# Altium PCB Ticket_Dispancer.PcbDoc (part 1 of 5)
Units mm, origin at the board's own origin, x right, y up, seen from the top; angles counter-clockwise.
Board outline 150.11 x 200.66 mm, 2 copper layers (Top Layer, Bottom Layer); 297 components, 258 nets, 997 pads, 217 vias.
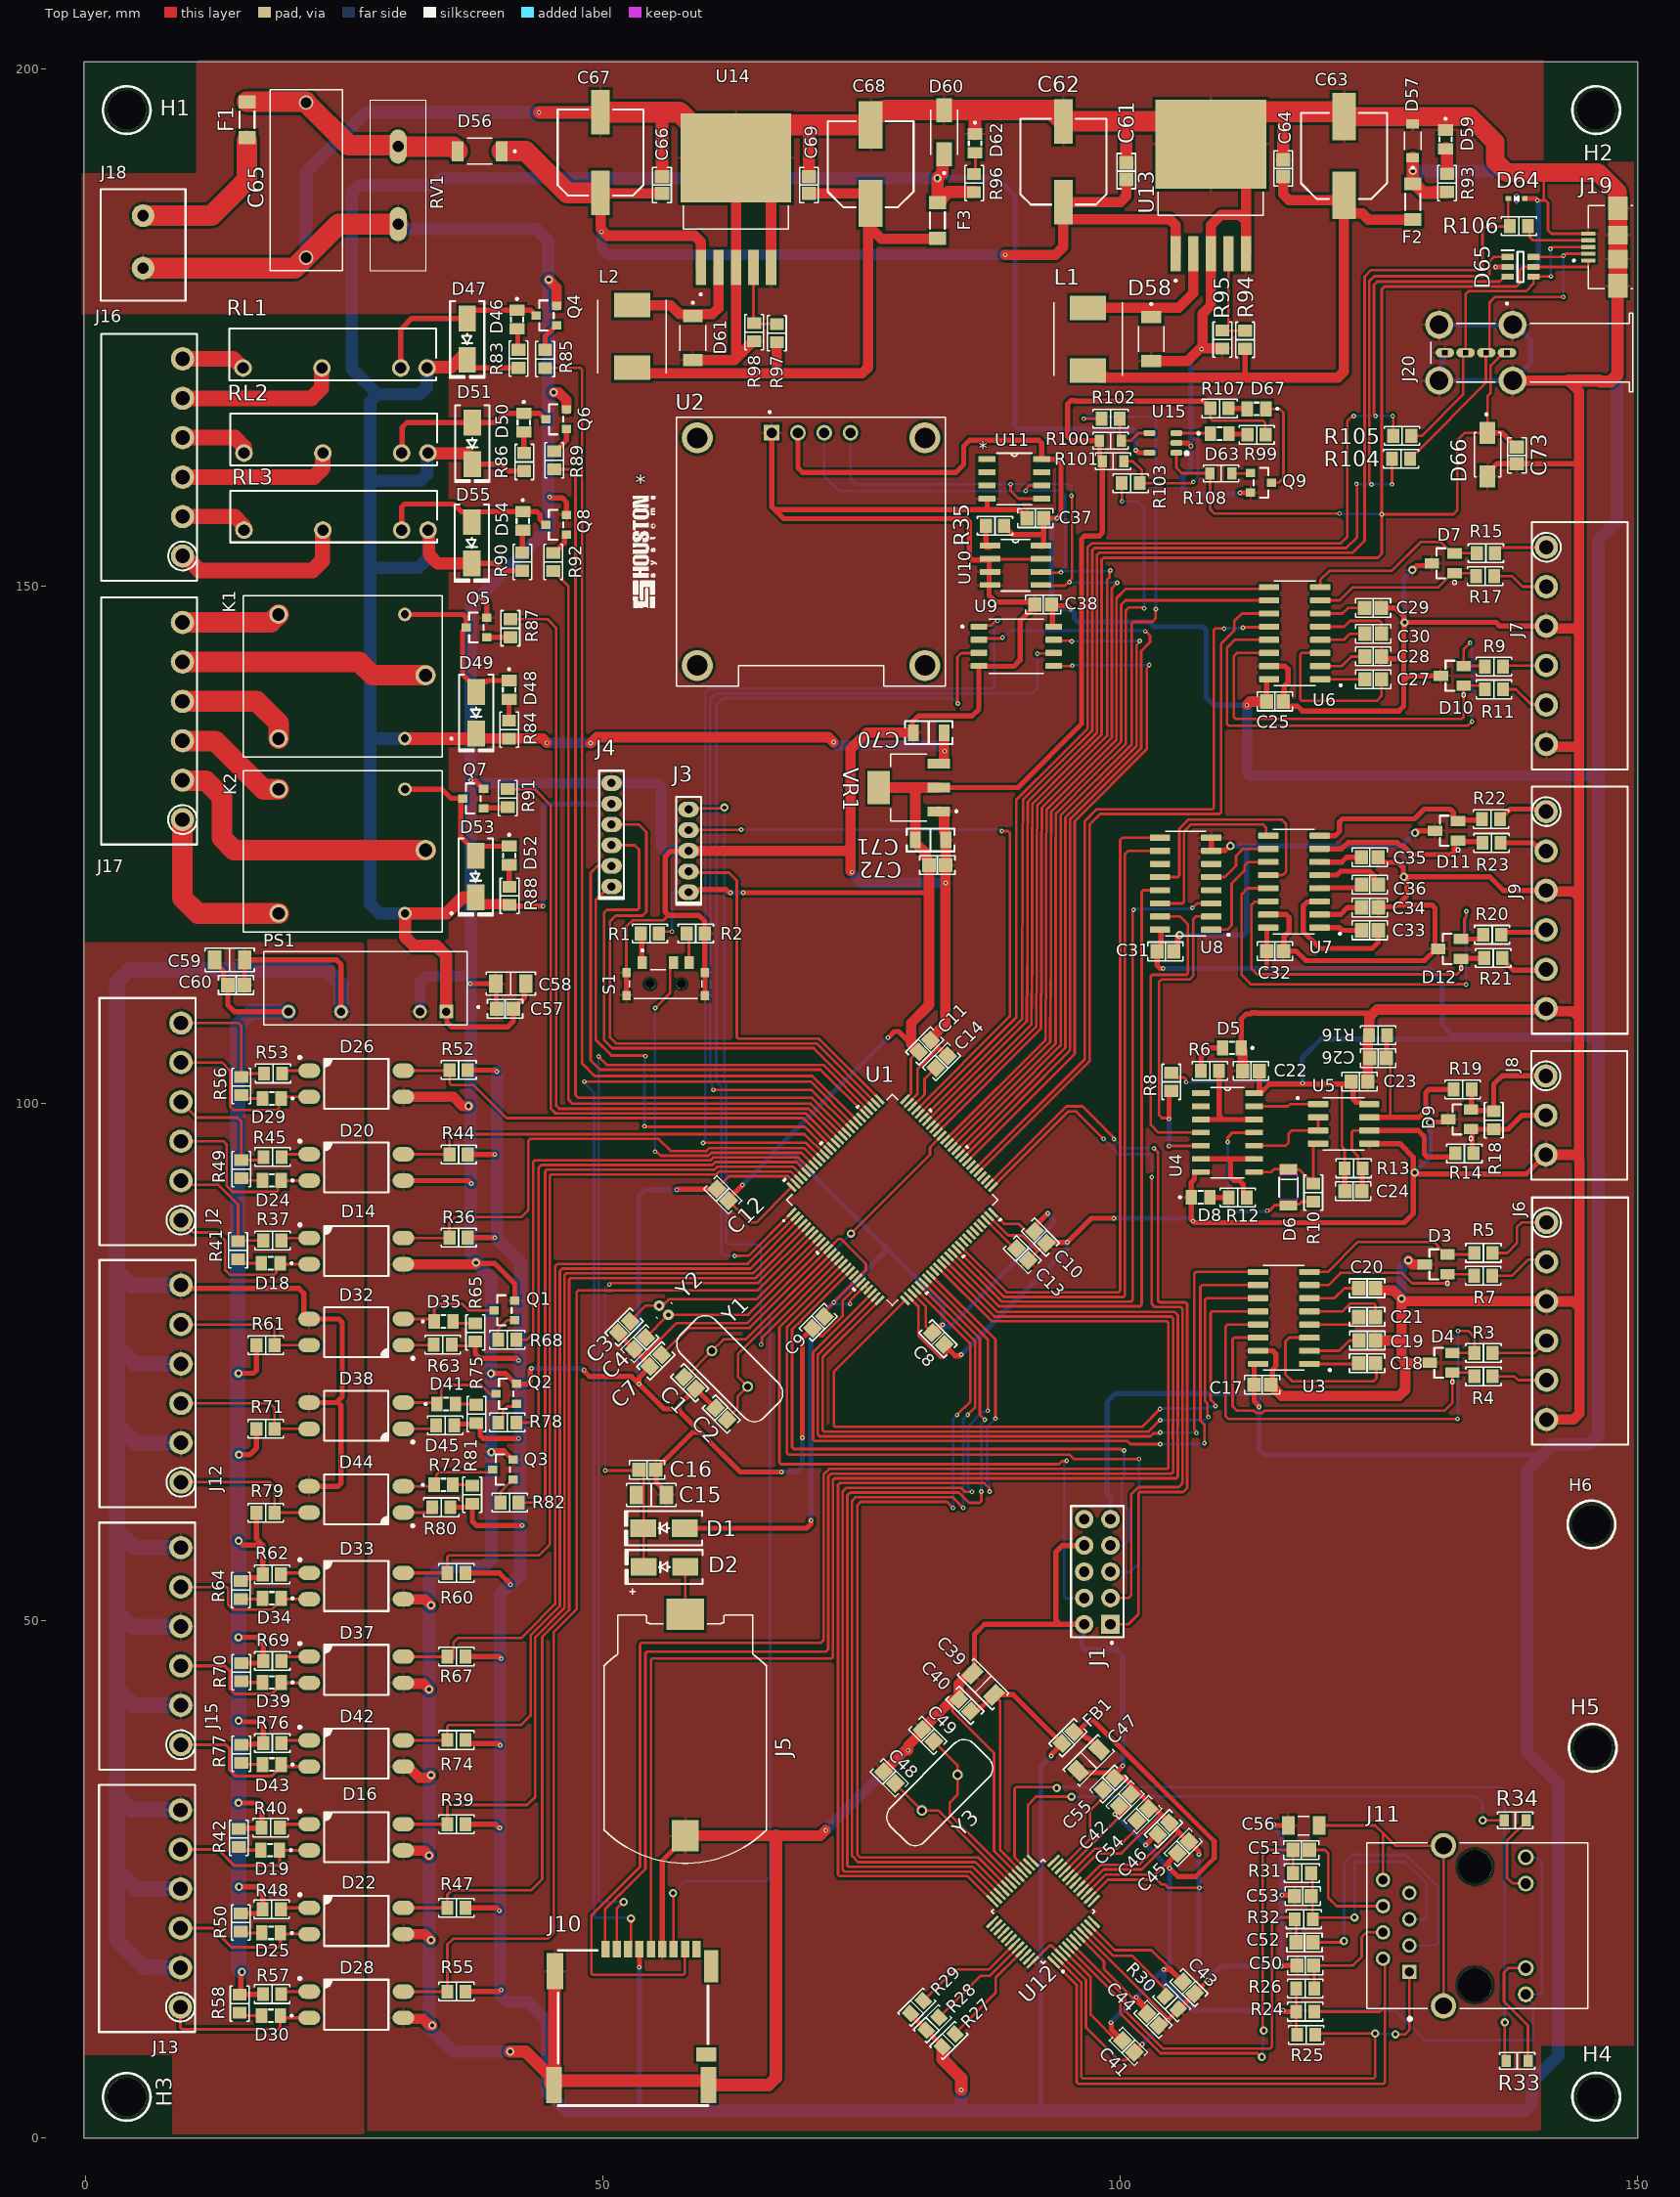
[diagram p0: Top Layer view]
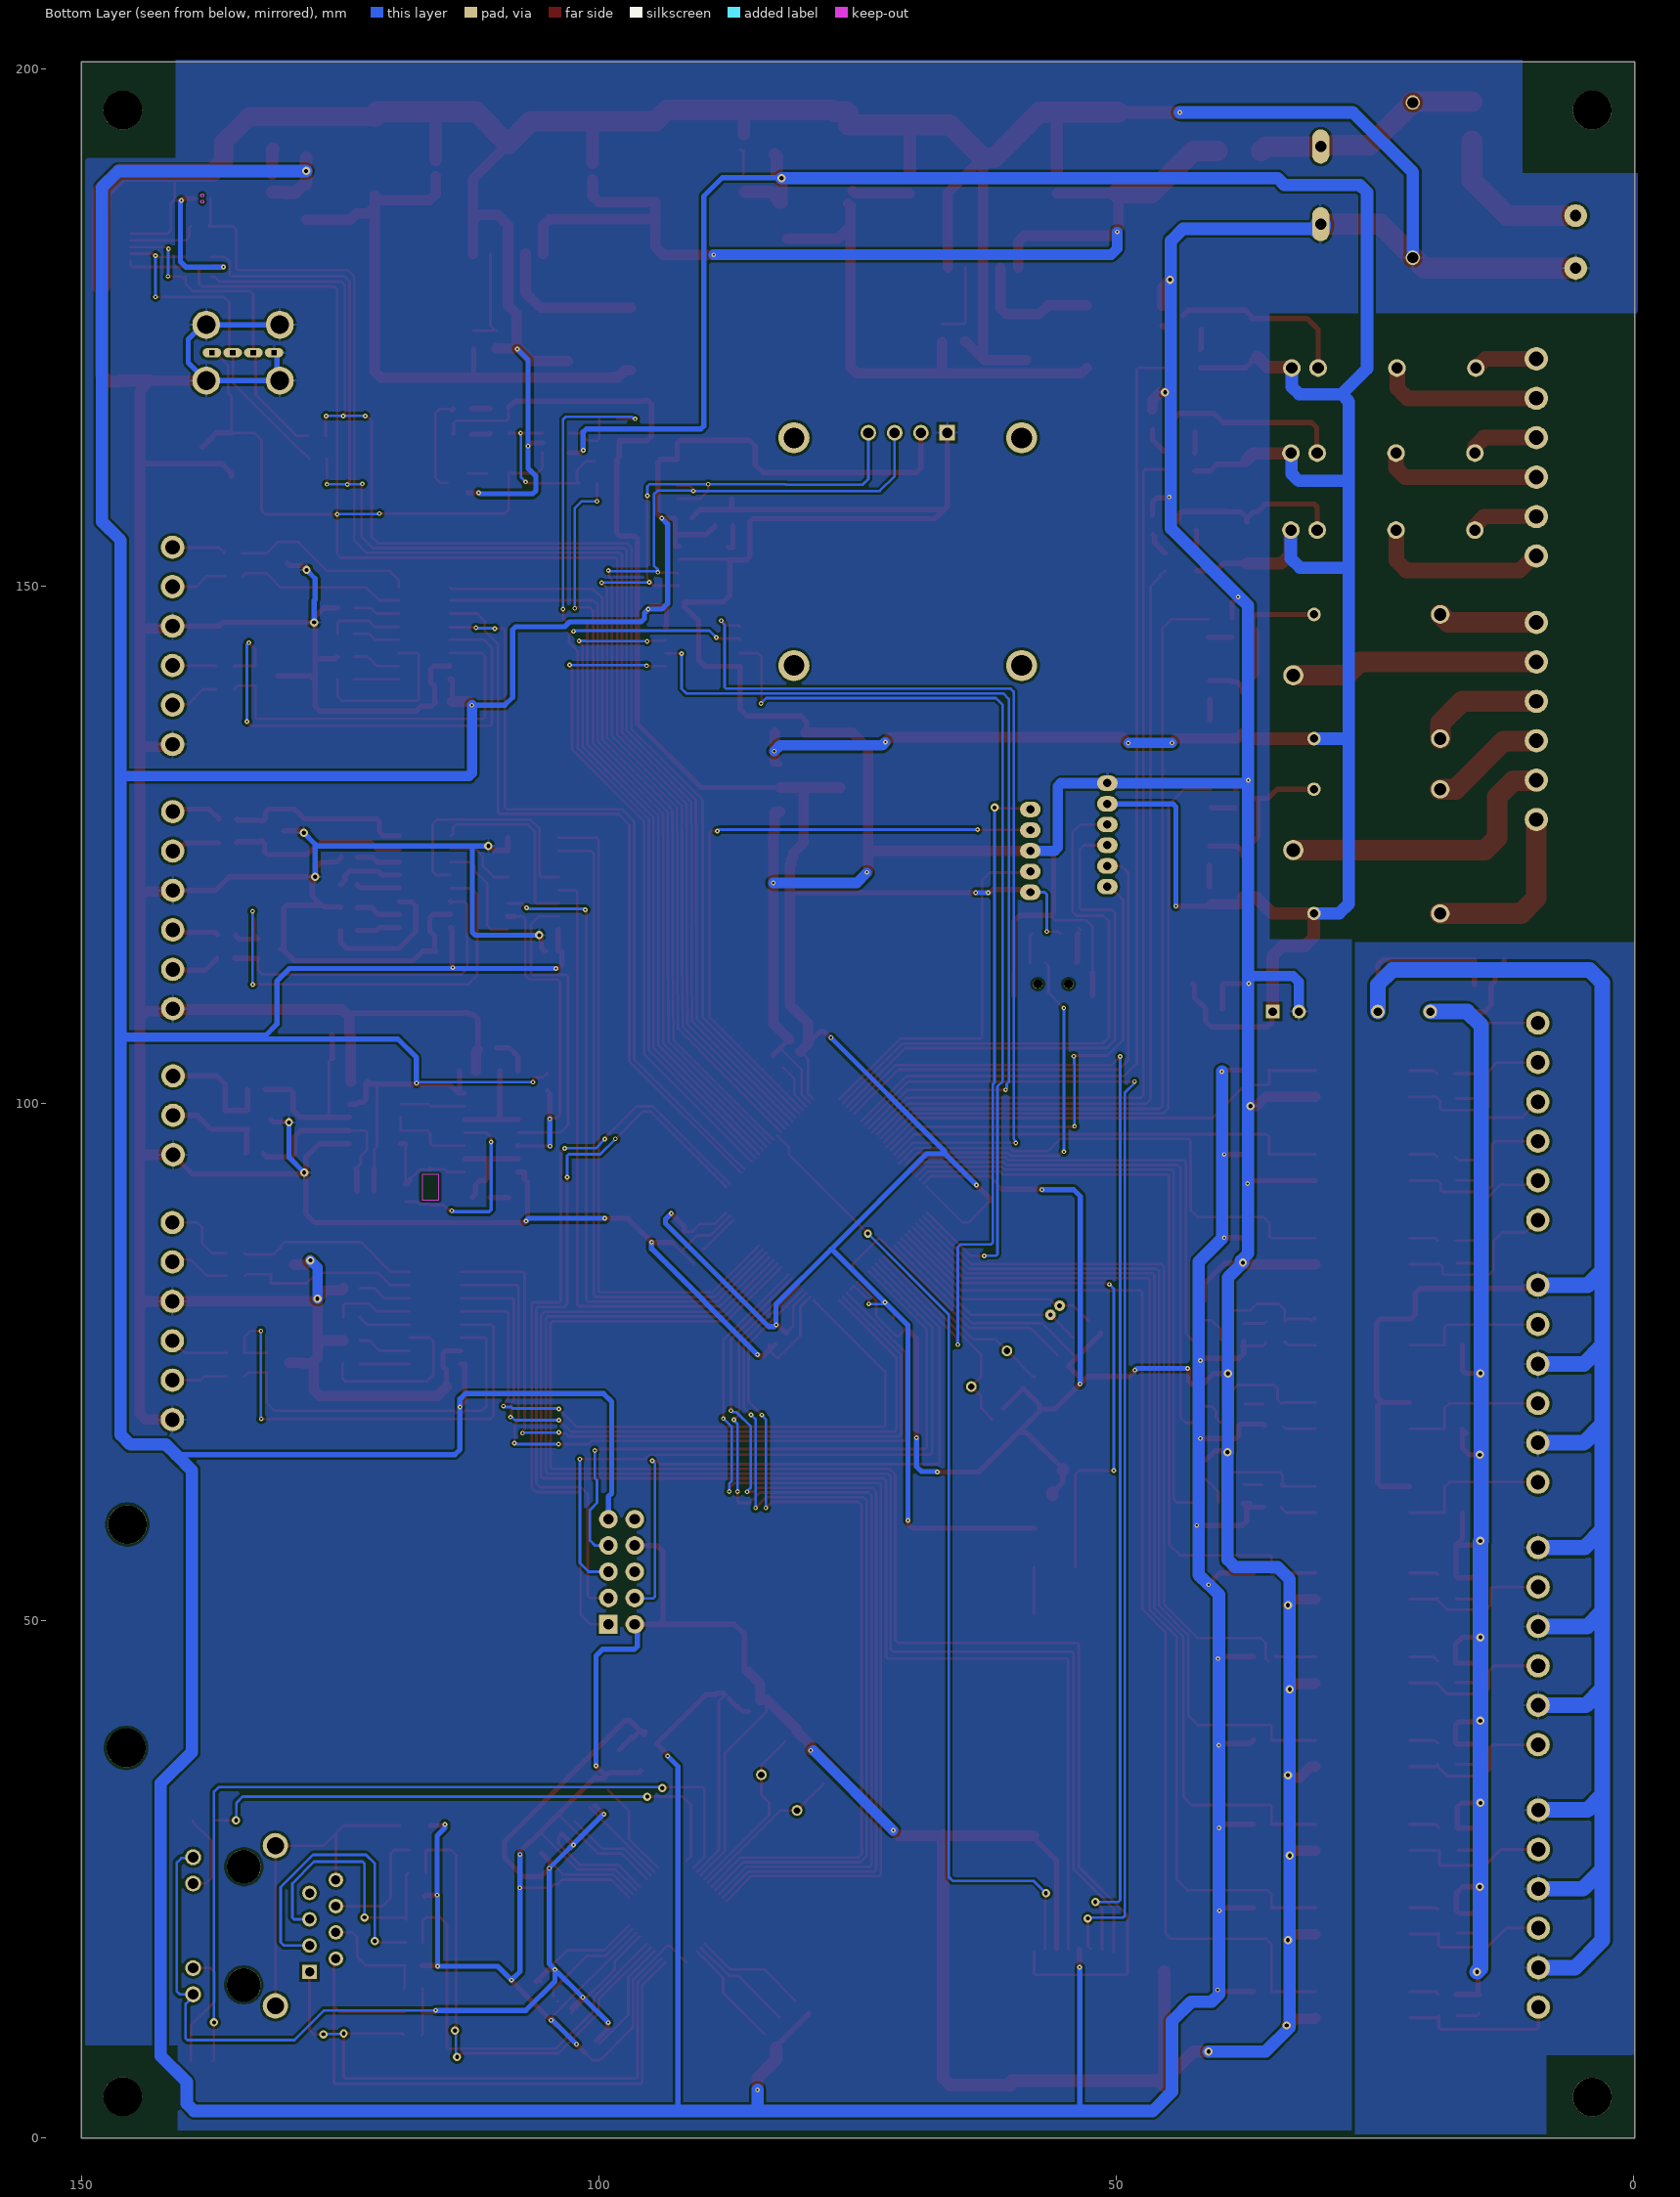
[diagram p1: Bottom Layer view, seen from below]
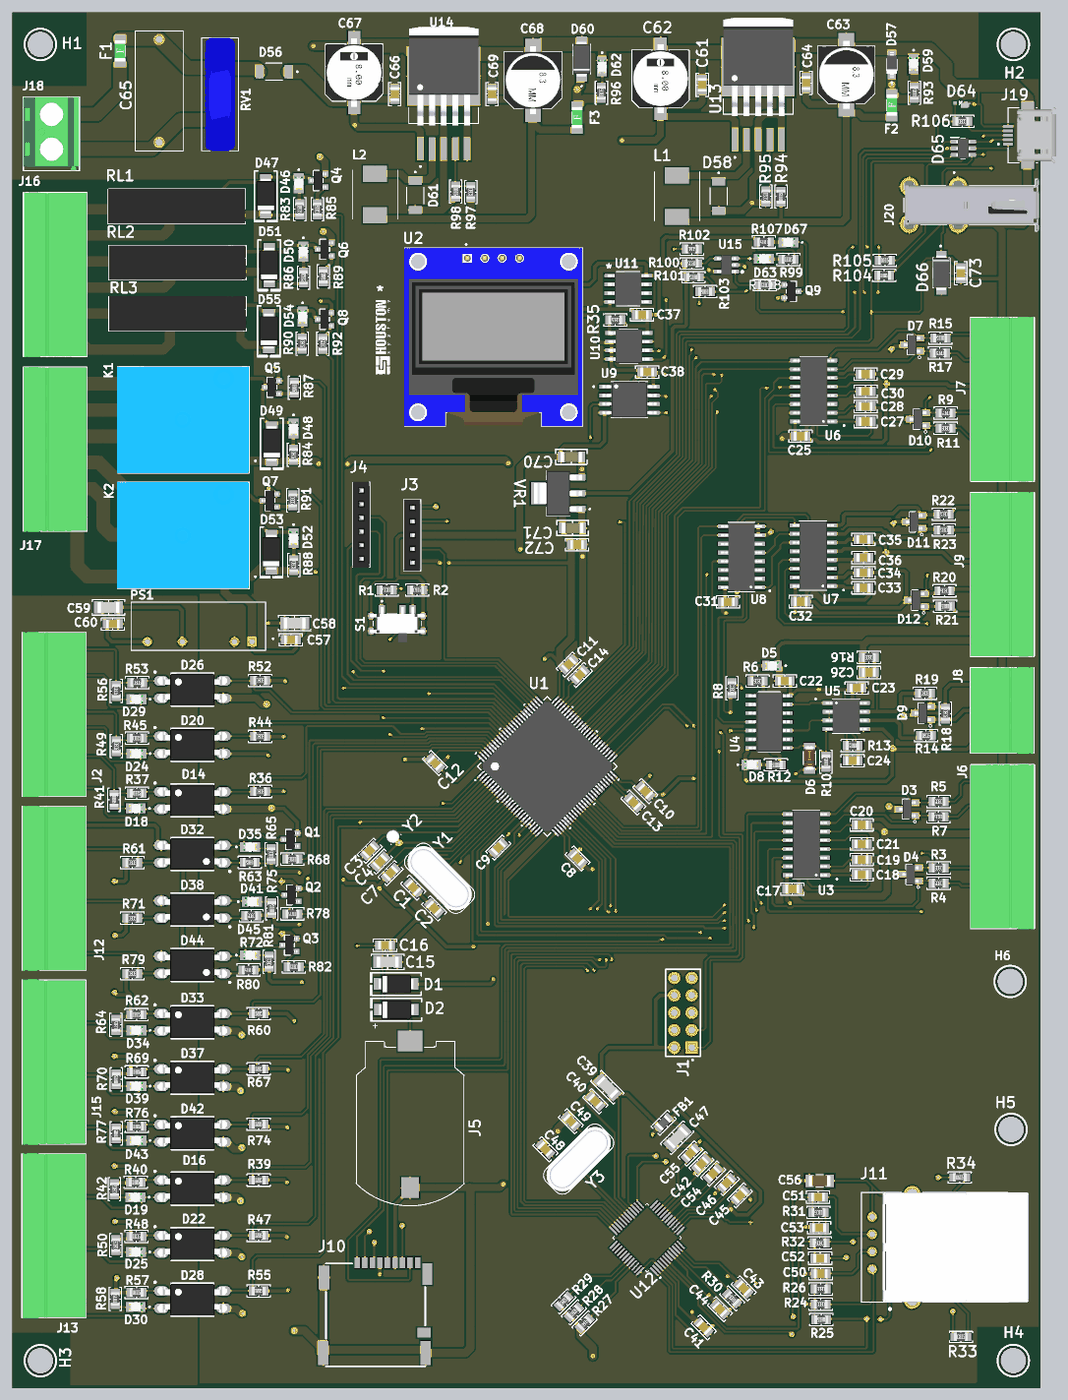
[diagram p4: 3D render of the assembled board from above, using the file's embedded part models]

## Layer stack, top to bottom
Top Solder: solder mask 0.0102, Solder Resist, Dk 3.5
Top Layer: signal copper 0.0356
Dielectric 1: dielectric 0.32, FR-4, Dk 4.8
Bottom Layer: signal copper 0.0356
Bottom Solder: solder mask 0.0102, Solder Resist, Dk 3.5

## Board outline
-0.127,0 149.987,0 149.987,200.66 -0.127,200.66

## Design rules (kind name [scope] priority, off if disabled: settings)
Clearance [All] p1: gap=0.254 ignorepadtopadclearanceinfootprint=TRUE except(0.2: Arc-Arc Arc-Track Arc-SMDPad Arc-THPad Track-Track Track-SMDPad Track-THPad SMDPad-SMDPad SMDPad-THPad THPad-THPad)
HoleSize [All] p1: absolutevalues=TRUE maxlimit=5 minlimit=0.15 maxpercent=80.000 minpercent=20.000
MatchedLengths [InNet('CMD') OR  InNet('D0') OR  InNet('D1') OR  InNet('D2') OR  InNet('D3')] p1: tolerance=0.25 checknetsindiffpair=FALSE checkdiffpairvsdiffpair=TRUE checkxsignals=TRUE checkothers=TRUE
MinimumSolderMaskSliver [All] p1: minsoldermaskwidth=0.001
PolygonConnect [All] p1: connectstyle=Relief reliefconductorwidth=0.254 reliefentries=4 polygonreliefangle="90 Angle" airgapwidth=0.254
RoutingVias Routingsignal [All] p1: holewidth=0.3 width=0.6 viastyle="Through Hole" minholewidth=0.2 minwidth=0.45 maxholewidth=0.4 maxwidth=0.8
RoutingVias RoutingVias_1 [All] p2: holewidth=0.711 width=1.27 viastyle="Through Hole" minholewidth=0.711 minwidth=1.27 maxholewidth=0.711 maxwidth=1.27
RoutingVias Routingpower [All] p3: holewidth=0.45 width=1 viastyle="Through Hole" minholewidth=0.35 minwidth=0.8 maxholewidth=0.6 maxwidth=1.4
SilkToSilkClearance [All] p1: silktosilkclearance=0.01
SilkToSolderMaskClearance [IsPad] p1: minsilkscreentomaskgap=0.01 clearancetoexposedcopper=TRUE
SolderMaskExpansion [All] p1: expansion=0.102 istentingtop=FALSE
Width [All] p1 off: maxlimit=0.5 minlimit=0.254 preferedwidth=0.254
Width Width_Current [InNetClass('High_current')] p2: maxlimit=3 minlimit=0.25 preferedwidth=2
Width Width_Signal [InNetClass('signal')] p3: maxlimit=0.5 minlimit=0.2 preferedwidth=0.25
Width Width_Power [InNetClass('power')] p4: maxlimit=1.8 minlimit=0.25 preferedwidth=1.2
26 further rules are at their usual default settings.

## Classes and differential pairs
net class High_current: GND NetC61_2 NetC63_1 NetC65_2 NetC68_1 NetD58_C NetD61_C NetF1_1 NetJ16_1 NetJ16_2 NetJ16_3 NetJ16_4 NetJ16_5 NetJ16_6 NetJ17_1 NetJ17_2 NetJ17_3 NetJ17_4 NetJ17_5 NetJ17_6
net class power: 3v3 5v GND MVCC
component class Usb: C73 D63 D64 D65 D66 D67 J19 J20 Q9 R99 R100 R101 R102 R103 R104 R105 R106 R107 R108 U15
component class Relay: D46 D47 D48 D49 D50 D51 D52 D53 D54 D55 J16 J17 K1 K2 Q4 Q5 Q6 Q7 Q8 R83 R84 R85 R86 R87 R88 R89 R90 R91 R92 RL1 RL2 RL3
component class Power: C61 C62 C63 C64 C65 C66 C67 C68 C69 C70 C71 C72 D56 D57 D58 D59 D60 D61 D62 F1 F2 F3 J18 L1 L2 R93 R94 R95 R96 R97 R98 RV1 U13 U14 VR1
component class DI_DO: C57 C58 C59 C60 D14 D16 D18 D19 D20 D22 D24 D25 D26 D28 D29 D30 D32 D33 D34 D35 D37 D38 D39 D41 D42 D43 D44 D45 J2 J12 J13 J15 PS1 Q1 Q2 Q3 R36 R37 R39 R40 R41 R42 R44 R45 R47 R48 R49 R50 R52 R53 R55 R56 R57 R58 R60 R61 R62 R63 R64 R65 R67 R68 R69 R70 R71 R72 R74 R75 R76 R77 R78 R79 R80 R81 R82
component class memory: C37 C38 J10 R35 U9 U10 U11
component class LAN: C39 C40 C41 C42 C43 C44 C45 C46 C47 C48 C49 C50 C51 C52 C53 C54 C55 C56 FB1 J11 R24 R25 R26 R27 R28 R29 R30 R31 R32 R33 R34 U12 Y3
component class main: * C1 C2 C3 C4 C7 C8 C9 C10 C11 C12 C13 C14 C15 C16 D1 D2 H1 H2 H3 H4 H5 H6 J1 J3 J4 J5 R1 R2 S1 U1 U2 Y1 Y2
component class commucation: C17 C18 C19 C20 C21 C22 C23 C24 C25 C26 C27 C28 C29 C30 C31 C32 C33 C34 C35 C36 D3 D4 D5 D6 D7 D8 D9 D10 D11 D12 J6 J7 J8 J9 R3 R4 R5 R6 R7 R8 R9 R10 R11 R12 R13 R14 R15 R16 R17 R18 R19 R20 R21 R22 R23 U3 U4 U5 U6 U7 U8

## Components (designator, comment, footprint, x,y, rotation, side; value= is the part's Value field where it differs from the comment)
* "HOUSTON_LOGO" HOUSTON_LOGO 57.74,151.22 r90 top
C1 "15pF" "CAP 0805_2012" 58.404,72.996 r315 top
C2 "15pF" "CAP 0805_2012" 61.454,69.976 r135 top
C3 "15pF" "CAP 0805_2012" 52.07,78.385 r225 top
C4 "15pF" "CAP 0805_2012" 53.593,76.79 r225 top
C7 "1µF" "CAP 0805_2012" 55.13,75.13 r45 top
C8 "1µF" "CAP 0805_2012" 82.406,77.254 r135 top
C9 "1µF" "CAP 0805_2012" 70.83,78.84 r45 top
C10 "1µF" "CAP 0805_2012" 92.284,87.076 r135 top
C11 "1µF" "CAP 0805_2012" 81.11,105.55 r225 top
C12 "1µF" "CAP 0805_2012" 61.594,91.166 r315 top
C13 "4.7 µF" "CAP 0805_2012" 90.54,85.39 r315 top
C14 "4.7 µF" "CAP 0805_2012" 82.744,104.026 r45 top
C15 "10 µF" "CAP 1206_3216 - 0.8MM" 54.69,62.15 r180 top
C16 "1µF" "CAP 0805_2012" 54.3,64.58 r180 top
C17 "1µF" "CAP 0805_2012" 113.74,72.8 r180 top
C18 "1µF" "CAP 0805_2012" 123.86,74.882 r180 top
C19 "1µF" "CAP 0805_2012" 123.867,77.086 r180 top
C20 "1µF" "CAP 0805_2012" 123.86,82.14 r180 top
C21 "1µF" "CAP 0805_2012" 123.86,79.36 r180 top
C22 "1µF" "CAP 0805_2012" 112.64,103.13 r0 top
C23 "1µF" "CAP 0805_2012" 123.13,102.11 r180 top
C24 "1000 pF" "CAP 0805_2012" 122.53,91.516 r180 top
C25 "1µF" "CAP 0805_2012" 114.95,138.84 r180 top
C26 "1000 pF" "CAP 0805_2012" 124.91,104.381 r180 top
C27 "1µF" "CAP 0805_2012" 124.443,140.987 r180 top
C28 "1µF" "CAP 0805_2012" 124.443,143.192 r180 top
C29 "1µF" "CAP 0805_2012" 124.43,147.88 r180 top
C30 "1µF" "CAP 0805_2012" 124.443,145.396 r180 top
C31 "1µF" "CAP 0805_2012" 104.36,114.69 r0 top
C32 "1µF" "CAP 0805_2012" 114.97,114.72 r180 top
C33 "1µF" "CAP 0805_2012" 124.134,116.729 r180 top
C34 "1µF" "CAP 0805_2012" 124.134,118.933 r180 top
C35 "1µF" "CAP 0805_2012" 124.11,123.79 r180 top
C36 "1µF" "CAP 0805_2012" 124.134,121.138 r180 top
C37 "1µF" "CAP 0805_2012" 91.8,156.559 r0 top
C38 "1µF" "CAP 0805_2012" 92.56,148.213 r0 top
C39 "10 µF" "CAP 1206_3216 - 0.8MM" 86.76,43.87 r315 top
C40 "1µF" "CAP 0805_2012" 84.99,41.82 r315 top
C41 "1µF" "CAP 0805_2012" 100.8,8.86 r135 top
C42 "1µF" "CAP 0805_2012" 100.475,32.68 r225 top
C43 "1µF" "CAP 0805_2012" 106.63,14.54 r135 top
C44 "1µF" "CAP 0805_2012" 103.17,11.47 r135 top
C45 "1µF" "CAP 0805_2012" 106.086,28.096 r225 top
C46 "1µF" "CAP 0805_2012" 104.183,29.908 r225 top
C47 "10 µF" "CAP 1206_3216 - 0.8MM" 96.96,36.51 r45 top
C48 "15pF" "CAP 0805_2012" 77.696,34.834 r315 top
C49 "15pF" "CAP 0805_2012" 81.41,38.91 r315 top
C50 "0.022 µF" "CAP 0805_2012" 117.889,16.683 r180 top
C51 "6800 pF" "CAP 0805_2012" 117.49,27.844 r0 top
C52 "6800 pF" "CAP 0805_2012" 117.809,18.915 r0 top
C53 "10000 pF" "CAP 0805_2012" 117.65,23.379 r0 top
C54 "4.7 µF" "CAP 0805_2012" 102.173,31.26 r45 top
C55 "10000 pF" "CAP 0805_2012" 98.898,34.22 r45 top
C56 "1206Y2K00102KXT" CAPC3216X160N 117.73,30.21 r0 top
C57 "1µF" "CAP 0805_2012" 40.56,109.15 r0 top
C58 "10 µF" "CAP 1206_3216 - 0.8MM" 41.115,111.579 r0 top
C59 "10 µF" "CAP 1206_3216 - 0.8MM" 13.943,113.869 r180 top
C60 "1µF" "CAP 0805_2012" 14.57,111.44 r180 top
C61 "1µF" "CAP 0805_2012" 100.59,190.1 r270 top
C62 "220 µF" "CAP ALSMD ELEC 8.3MM H11MM" 94.51,191.01 r90 top
C63 "470 µF" "CAP ALSMD 8.3MM H10.5MM" 121.63,191.57 r90 top
C64 "1µF" "CAP 0805_2012" 115.75,190.38 r270 top
C65 "ECWFE2W105JA" CAPRR1500W80L1750T700H1250 21.336,189.23 r90 top
C66 "1µF" "CAP 0805_2012" 55.72,188.76 r270 top
C67 "220 µF" "CAP ALSMD ELEC 8.3MM H11MM" 49.784,191.897 r90 top
C68 "470 µF" "CAP ALSMD 8.3MM H10.5MM" 75.89,190.77 r90 top
C69 "1µF" "CAP 0805_2012" 69.93,188.76 r270 top
C70 "10 µF" "MURATA CAP GRM31C 1206_3216" 81.5,135.83 r0 top
C71 "10 µF" "MURATA CAP GRM31C 1206_3216" 81.678,125.461 r180 top
C72 "1µF" "CAP 0805_2012" 82.324,123.032 r180 top
C73 "4.7 µF" "CAP 0805_2012" 138.33,162.63 r90 top
D1 "CGRA4007-G" "DO214AC SMA" 55.91,58.945 r180 top
D2 "CGRA4007-G" "DO214AC SMA" 55.96,55.189 r180 top
D3 "SM712.TCT" SM712.TCT 130.53,84.45 r180 top
D4 "SM712.TCT" SM712.TCT 131.01,74.93 r180 top
D5 "597-3305-607F" LEDC2012X70N 110.78,105.36 r180 top
D6 "LL4148-GS08" MELF_SOD-80 116.27,91.89 r90 top
D7 "SM712.TCT" SM712.TCT 131.21,152.2 r180 top
D8 "597-3305-607F" LEDC2012X70N 107.779,90.93 r0 top
D9 "SM712.TCT" SM712.TCT 132.79,98.45 r180 top
D10 "SM712.TCT" SM712.TCT 132.09,141.33 r180 top
D11 "SM712.TCT" SM712.TCT 131.54,126.35 r180 top
D12 "SM712.TCT" SM712.TCT 131.84,114.93 r180 top
D14 "LTV-817S-TA1" "LITEON LTV-817" 26.189,85.72 r0 top locked
D16 "LTV-817S-TA1" "LITEON LTV-817" 26.189,29.07 r0 top locked
D18 "597-3305-607F" LEDC2012X70N 17.92,84.55 r180 top
D19 "597-3305-607F" LEDC2012X70N 17.87,27.83 r180 top
D20 "LTV-817S-TA1" "LITEON LTV-817" 26.189,93.81 r0 top locked
D22 "LTV-817S-TA1" "LITEON LTV-817" 26.189,20.98 r0 top locked
D24 "597-3305-607F" LEDC2012X70N 18.024,92.55 r180 top
D25 "597-3305-607F" LEDC2012X70N 17.95,19.83 r180 top
D26 "LTV-817S-TA1" "LITEON LTV-817" 26.189,101.9 r0 top locked
D28 "LTV-817S-TA1" "LITEON LTV-817" 26.189,12.89 r0 top locked
D29 "597-3305-607F" LEDC2012X70N 18.024,100.474 r180 top
D30 "597-3305-607F" LEDC2012X70N 17.934,11.83 r180 top
D32 "LTV-817S-TA1" "LITEON LTV-817" 26.18,77.9 r180 top locked
D33 "LTV-817S-TA1" "LITEON LTV-817" 26.189,53.35 r0 top locked
D34 "597-3305-607F" LEDC2012X70N 18.024,52.17 r180 top
D35 "597-3305-607F" LEDC2012X70N 34.611,78.926 r0 top
D37 "LTV-817S-TA1" "LITEON LTV-817" 26.189,45.26 r0 top locked
D38 "LTV-817S-TA1" "LITEON LTV-817" 26.18,69.81 r180 top locked
D39 "597-3305-607F" LEDC2012X70N 18.024,44.04 r180 top
D41 "597-3305-607F" LEDC2012X70N 34.876,70.941 r0 top
D42 "LTV-817S-TA1" "LITEON LTV-817" 26.189,37.17 r0 top locked
D43 "597-3305-607F" LEDC2012X70N 18.024,36.106 r180 top
D44 "LTV-817S-TA1" "LITEON LTV-817" 26.18,61.72 r180 top locked
D45 "597-3305-607F" LEDC2012X70N 34.608,63.14 r0 top
D46 "597-3305-607F" LEDC2012X70N 41.71,175.75 r270 top
D47 "CGRA4007-G" "DO214AC SMA" 36.898,173.863 r270 top
D48 "597-3305-607F" LEDC2012X70N 40.947,139.965 r270 top
D49 "CGRA4007-G" "DO214AC SMA" 37.772,137.763 r270 top
D50 "597-3305-607F" LEDC2012X70N 42.37,165.79 r270 top
D51 "CGRA4007-G" "DO214AC SMA" 37.4,163.79 r270 top
D52 "597-3305-607F" LEDC2012X70N 40.96,123.96 r270 top
D53 "CGRA4007-G" "DO214AC SMA" 37.719,121.92 r270 top
D54 "597-3305-607F" LEDC2012X70N 42.27,156.3 r270 top
D55 "CGRA4007-G" "DO214AC SMA" 37.338,154.178 r270 top
D56 "SS54FSH_M2G" SODFL4725X110N 38.1,192.024 r180 top
D57 "SZMMSZ5227BT1G" DIO_SZMMSZ5227BT1G 128.27,193.04 r90 top
D58 "SS54FSH_M2G" SODFL4725X110N 102.997,173.863 r270 top
D59 "597-3305-607F" LEDC2012X70N 131.445,193.167 r270 top
D60 "SZ1SMA5918BT3G" DIOM5226X220N 82.99,193.86 r90 top
D61 "SS54FSH_M2G" SODFL4725X110N 58.71,173.98 r270 top
D62 "597-3305-607F" LEDC2012X70N 85.97,192.79 r270 top
D63 "597-3305-607F" LEDC2012X70N 109.6,164.73 r0 top
D64 "ESD5Z3V3" SOD-523_DIOTEC-SEMICONDUCTOR 138.303,187.452 r0 top
D65 "USBLC6-2SC6Y" SOT95P280X145-6N 138.684,180.848 r0 top
D66 "SMAJ5.0AH" DIOM4325X250N 135.49,162.69 r270 top
D67 "597-3305-607F" LEDC2012X70N 113.18,167.13 r180 top
F1 "CC12H1.5A-TR" "FUSE 1206_3216 0.6MM" 15.621,195.072 r90 top
F2 "3413.0220.22" "FUSE 1206_3216 0.6MM" 128.27,187.145 r90 top
F3 "3413.0220.22" "FUSE 1206_3216 0.6MM" 82.338,185.333 r90 top
FB1 "100 Ohms @ 100 MHz" "FER 0805_2012" 94.956,38.696 r45 top
H1 "ScrewHole_3.75mmD" "ScrewHole_3.75mmD - duplicate" 4,196 r0 top
H2 "ScrewHole_3.75mmD" "ScrewHole_3.75mmD - duplicate" 146,196 r0 top
H3 "ScrewHole_3.75mmD" "ScrewHole_3.75mmD - duplicate" 4,3.981 r0 top
H4 "ScrewHole_3.75mmD" "ScrewHole_3.75mmD - duplicate" 146,4 r0 top
H5 "ScrewHole_3.75mmD" "ScrewHole_3.75mmD - duplicate" 145.669,37.719 r0 top
H6 "ScrewHole_3.75mmD" "ScrewHole_3.75mmD - duplicate" 145.542,59.309 r0 top
J1 "10 Pin 5X2Pos THT" "10 Pin 5X2Pos THT" 97.79,54.737 r90 top
J2 "OQ0632510000G" "FCI 06-381-6PIN" 5.938,98.245 r90 top
J3 "NPPN051BFCN-RC" "SULLINS NPPN051BFCN" 58.29,124.41 r90 top
J4 "NPPN061BFCN-RC" "SULLINS NPPN061BFCN" 50.85,125.95 r90 top
J5 "S8421-45R" HARWIN_S8421-45R 57.97,37.72 r180 top
J6 "OQ0632510000G" "FCI 06-381-6PIN" 144.502,78.965 r270 top
J7 "OQ0632510000G" "FCI 06-381-6PIN" 144.482,144.225 r270 top
J8 "OQ0332510000G" "FCI 06-381-3PIN" 144.432,98.85 r270 top
J9 "OQ0632510000G" "FCI 06-381-6PIN" 144.462,118.675 r270 top
J10 "PJS008-2003-0" PJS008-2003-0 52.925,18.146 r0 top
J11 "HR911105A" HANRUN_HR911105A 134.292,20.518 r270 top
J12 "OQ0632510000G" "FCI 06-381-6PIN" 5.938,72.915 r90 top
J13 "OQ0632510000G" "FCI 06-381-6PIN" 5.888,22.185 r90 top
J15 "OQ0632510000G" "FCI 06-381-6PIN" 5.918,47.545 r90 top
J16 "OQ0632510000G" "FCI 06-381-6PIN" 6.096,162.433 r90 top
J17 "OQ0632510000G" "FCI 06-381-6PIN" 6.088,136.955 r90 top
J18 "282837-2" "TE 282837-2" 5.588,183.261 r270 top
J19 "10104111-0001LF" AMPHENOL_10104111-0001LF 148.082,182.76 r90 top
J20 "54-00013" TENSILITY_54-00013 137.922,172.554 r90 top
K1 "SRD-12VDC-SL-C" RELAY_SRD-12VDC-SL-C 24.772,141.255 r180 top
K2 "SRD-12VDC-SL-C" RELAY_SRD-12VDC-SL-C 24.78,124.36 r180 top
L1 "ASPI-0630LR-220M-T15" IND_ASPI-0630LR-220M-T15 96.901,173.863 r270 top
L2 "ASPI-0630LR-220M-T15" IND_ASPI-0630LR-220M-T15 52.832,174.117 r270 top
PS1 "RK-0505S/H" CONV_RK-0505S/H 27.051,111.125 r180 top
Q1 "BC847BLT1G" "ON SEMI SOT-23-3" 40.5,80 r180 top
Q2 "BC847BLT1G" "ON SEMI SOT-23-3" 40.664,71.934 r180 top
Q3 "BC847BLT1G" "ON SEMI SOT-23-3" 40.35,64.61 r180 top
Q4 "BC847BLT1G" "ON SEMI SOT-23-3" 44.56,176.15 r180 top
Q5 "BC847BLT1G" "ON SEMI SOT-23-3" 37.788,145.989 r180 top
Q6 "BC847BLT1G" "ON SEMI SOT-23-3" 45.5,166.11 r180 top
Q7 "BC847BLT1G" "ON SEMI SOT-23-3" 37.481,129.474 r180 top
Q8 "BC847BLT1G" "ON SEMI SOT-23-3" 45.49,155.909 r180 top
Q9 "BC847BLT1G" "ON SEMI SOT-23-3" 113.61,159.98 r0 top
R1 "1 kOhms" "RES 0805_2012" 54.55,116.43 r180 top
R2 "1 kOhms" "RES 0805_2012" 58.985,116.42 r0 top
R3 "10 Ohms" "RES 0805_2012" 135.1,75.87 r180 top
R4 "10 Ohms" "RES 0805_2012" 135.1,73.626 r180 top
R5 "10 Ohms" "RES 0805_2012" 135.1,85.544 r180 top
R6 "330 Ohms" "RES 0805_2012" 108.68,103.13 r180 top
R7 "10 Ohms" "RES 0805_2012" 135.07,83.34 r180 top
R8 "10 kOhms" "RES 0805_2012" 104.94,102.08 r90 top
R9 "10 Ohms" "RES 0805_2012" 136.12,142.22 r180 top
R10 "1 kOhms" "RES 0805_2012" 118.66,91.365 r90 top
R11 "10 Ohms" "RES 0805_2012" 136.116,140.016 r180 top
R12 "330 Ohms" "RES 0805_2012" 111.36,90.9 r180 top
R13 "1 kOhms" "RES 0805_2012" 122.555,93.72 r180 top
R14 "10 Ohms" "RES 0805_2012" 133.259,95.171 r0 top
R15 "10 Ohms" "RES 0805_2012" 135.341,153.174 r180 top
R16 "1 kOhms" "RES 0805_2012" 124.919,106.586 r180 top
R17 "10 Ohms" "RES 0805_2012" 135.27,150.97 r180 top
R18 "120 Ohms" "RES 0805_2012" 136.094,98.376 r270 top
R19 "10 Ohms" "RES 0805_2012" 133.099,101.341 r0 top
R20 "10 Ohms" "RES 0805_2012" 135.95,116.3 r180 top
R21 "10 Ohms" "RES 0805_2012" 136.05,114.05 r180 top
R22 "10 Ohms" "RES 0805_2012" 135.84,127.48 r180 top
R23 "10 Ohms" "RES 0805_2012" 135.87,125.18 r180 top
R24 "49.9 Ohms" "RES 0805_2012" 117.889,12.218 r180 top
R25 "49.9 Ohms" "RES 0805_2012" 117.969,9.986 r180 top
R26 "11 Ohms" "RES 0805_2012" 117.889,14.45 r180 top
R27 "10 kOhms" "RES 0805_2012" 83.43,9.44 r45 top
R28 "10 kOhms" "RES 0805_2012" 81.865,11.044 r45 top
R29 "10 kOhms" "RES 0805_2012" 80.357,12.653 r45 top
R30 "12.4 kOhms" "RES 0805_2012" 104.969,13.071 r135 top
R31 "49.9 Ohms" "RES 0805_2012" 117.57,25.612 r180 top
R32 "49.9 Ohms" "RES 0805_2012" 117.729,21.147 r180 top
R33 "330 Ohms" "YAGEO RES 0805_2012" 138.36,7.46 r0 top
R34 "330 Ohms" "YAGEO RES 0805_2012" 138.176,30.716 r0 top
R35 "1 kOhms" "RES 0805_2012" 87.905,155.83 r180 top
R36 "10 kOhms" "RES 0805_2012" 36.075,87.02 r0 top
R37 "1 kOhms" "RES 0805_2012" 18.075,86.76 r0 top
R39 "10 kOhms" "RES 0805_2012" 35.855,30.331 r0 top
R40 "1 kOhms" "RES 0805_2012" 17.92,30.01 r0 top
R41 "330 Ohms" "RES 0805_2012" 14.756,85.806 r270 top
R42 "330 Ohms" "RES 0805_2012" 14.82,29 r90 top
R44 "10 kOhms" "RES 0805_2012" 36.075,95.05 r0 top
R45 "1 kOhms" "RES 0805_2012" 18.084,94.81 r0 top
R47 "10 kOhms" "RES 0805_2012" 35.855,22.252 r0 top
R48 "1 kOhms" "RES 0805_2012" 18.014,22.1 r0 top
R49 "330 Ohms" "RES 0805_2012" 15.08,93.64 r270 top
R50 "330 Ohms" "RES 0805_2012" 15.01,20.84 r90 top
R52 "10 kOhms" "RES 0805_2012" 36.075,103.22 r0 top
R53 "1 kOhms" "RES 0805_2012" 18.137,102.887 r0 top
R55 "10 kOhms" "RES 0805_2012" 35.855,14.16 r0 top
R56 "330 Ohms" "RES 0805_2012" 15.06,101.68 r270 top
R57 "1 kOhms" "RES 0805_2012" 18.035,13.92 r0 top
R58 "330 Ohms" "RES 0805_2012" 14.91,12.99 r90 top
R60 "10 kOhms" "RES 0805_2012" 35.855,54.61 r0 top
R61 "10 kOhms" "RES 0805_2012" 17.415,76.64 r0 top
R62 "1 kOhms" "RES 0805_2012" 18.028,54.47 r0 top
R63 "1 kOhms" "RES 0805_2012" 34.55,76.68 r180 top
R64 "330 Ohms" "RES 0805_2012" 15.024,52.97 r90 top
R65 "330 Ohms" "RES 0805_2012" 37.68,77.865 r90 top
R67 "10 kOhms" "RES 0805_2012" 35.855,46.548 r0 top
R68 "330 Ohms" "RES 0805_2012" 40.77,77.16 r180 top
R69 "1 kOhms" "RES 0805_2012" 18.068,46.113 r0 top
R70 "330 Ohms" "RES 0805_2012" 15.064,45.02 r90 top
R71 "10 kOhms" "RES 0805_2012" 17.415,68.54 r0 top
R72 "1 kOhms" "RES 0805_2012" 34.776,68.885 r180 top
R74 "10 kOhms" "RES 0805_2012" 35.855,38.48 r0 top
R75 "330 Ohms" "RES 0805_2012" 37.78,69.99 r90 top
R76 "1 kOhms" "RES 0805_2012" 18.068,38.169 r0 top
R77 "330 Ohms" "RES 0805_2012" 15.064,37.146 r90 top
R78 "330 Ohms" "RES 0805_2012" 40.784,69.155 r180 top
R79 "10 kOhms" "RES 0805_2012" 17.415,60.44 r0 top
R80 "1 kOhms" "RES 0805_2012" 34.385,60.97 r180 top
R81 "330 Ohms" "RES 0805_2012" 37.389,62.175 r90 top
R82 "330 Ohms" "RES 0805_2012" 40.99,61.43 r180 top
R83 "330 Ohms" "RES 0805_2012" 41.86,171.965 r270 top
R84 "330 Ohms" "RES 0805_2012" 40.947,136.13 r270 top
R85 "1 kOhms" "RES 0805_2012" 44.43,171.95 r90 top
R86 "330 Ohms" "RES 0805_2012" 42.41,161.99 r270 top
R87 "1 kOhms" "RES 0805_2012" 41.074,145.923 r270 top
R88 "330 Ohms" "RES 0805_2012" 40.99,120.05 r270 top
R89 "1 kOhms" "RES 0805_2012" 45.3,162.155 r90 top
R90 "330 Ohms" "RES 0805_2012" 42.22,152.345 r270 top
R91 "1 kOhms" "RES 0805_2012" 40.83,129.495 r270 top
R92 "1 kOhms" "RES 0805_2012" 45.22,152.33 r90 top
R93 "330 Ohms" "RES 0805_2012" 131.572,188.962 r90 top
R94 "1.65 kOhms" "RES 0805_2012" 112.08,173.8 r90 top
R95 "1 kOhms" "RES 0805_2012" 109.876,173.83 r270 top
R96 "330 Ohms" "RES 0805_2012" 85.88,188.955 r90 top
R97 "3.16 kOhms" "RES 0805_2012" 66.824,174.45 r270 top
R98 "1 kOhms" "RES 0805_2012" 64.62,174.525 r270 top
R99 "680 Ohms" "RES 0805_2012" 113.185,164.626 r0 top
R100 "10 kOhms" "YAGEO RES 0805_2012" 99.06,164.056 r180 top
R101 "47 kOhms" "YAGEO RES 0805_2012" 99.314,162.052 r180 top
R102 "1 Ohms" "RES 0805_2012" 99.074,166.161 r0 top
R103 "1 Ohms" "RES 0805_2012" 101.009,159.948 r180 top
R104 "22 Ohms" "RES 0805_2012" 127.141,162.306 r0 top
R105 "22 Ohms" "RES 0805_2012" 127.254,164.51 r0 top
R106 "1 Ohms" "RES 0805_2012" 138.543,184.785 r0 top
R107 "330 Ohms" "RES 0805_2012" 109.595,167.18 r180 top
R108 "47 kOhms" "YAGEO RES 0805_2012" 109.74,160.89 r180 top
RL1 "G6DN-1A DC5" "OMRON G6DN" 23.911,172.379 r180 top
RL2 "G6DN-1A DC5" "OMRON G6DN" 24,164.162 r180 top
RL3 "G6DN-1A DC5" "OMRON G6DN" 24.003,156.718 r180 top
RV1 "MOV-14D471K" MOV14D471K 30.226,188.722 r90 top
S1 "MSK12C02" SW_MSK12C02 56.08,111.531 r0 top
U1 "STM32F446VET6" LQFP100-14X14MM 77.978,90.678 r45 top
U2 "DM-OLED096-636" MODULE_DM-OLED096-636 70.13,153.32 r0 top
U3 "MAX3232ESE" SOIC127P600X175-16N#1 115.805,79.264 r180 top
U4 "74HC14D" SOIC127P600X175-14N 110.373,97.177 r0 top
U5 "MAX3485EESA+" SOIC127P600X175-8N#1 121.6,98.016 r0 top
U6 "MAX3232ESE" SOIC127P600X175-16N#1 116.86,145.44 r180 top
U7 "MAX3232ESE" SOIC127P600X175-16N#1 116.785,121.425 r180 top
U8 "CD4052BMT" SOIC127P600X175-16N#2 106.325,121.235 r180 top
U9 "W25Q128JVSIQ" SOIC127P790X216-8N 89.969,144.176 r0 top
U10 "AT24C512C-SSHM-T" SOIC127P600X175-8N#2 89.89,152.007 r0 top
U11 "24AA02E48-I_SN" SOIC127P600X175-8N#3 89.78,160.354 r0 top
U12 "W5500" QFP50P900X900X160-48N 92.56,21.9 r135 top
U13 "LM2576HVSX-5.0/NOPB" VREG_TPS79625KTTR 108.761,192.718 r90 top
U14 "LM2576HVSX-5.0/NOPB" VREG_TPS79625KTTR 62.865,191.389 r90 top
U15 "STMPS2141STR" SOT95P280X145-5N 104.129,163.83 r180 top
VR1 "LM1117IMP-3.3/NOPB" VREG_LM1117IMP-3.3/NOPB 79.568,130.525 r180 top
Y1 "ECS-17.1776-20-4" XTAL_ECS-160-20-4X 62.27,74.36 r135 top
Y2 "CFS-20632768EZBB" CFS20632768EZBB 55.456,80.455 r315 top
Y3 "ECS-17.1776-20-4" XTAL_ECS-160-20-4X 82.56,33.39 r225 top

## Footprints (in the part's own frame and the unit in brackets; to place one, negate y for a bottom-side part, rotate by r counter-clockwise, add the part's x,y. Pads: shape width x height; smd on the part's side, far side on the other; paste and mask are expansions set on the pad)
"10 Pin 5X2Pos THT" [mm] "10 Pin 5X2Pos THT BergeStick 2.54MM MTSW-105-X-X-D-X"
  rect 1.8x1.8 hole 1.02: 1(-5.08,-1.27)
  round 1.8 hole 1.02: 2(-5.08,1.27) 3(-2.54,-1.27) 4(-2.54,1.27) 5(0,-1.27) 6(0,1.27) 7(2.54,-1.27) 8(2.54,1.27) 9(5.08,-1.27) 10(5.08,1.27)
  silkscreen extent -6.97,-2.54 6.35,2.54
AMPHENOL_10104111-0001LF [mm]
  rect 0.4x1.4 smd: 1(-1.3,2.85) 2(-0.65,2.85) 3(0,2.85) 4(0.65,2.85) 5(1.3,2.85)
  rect 2.3x1.9 smd: SH1(-3.75,0) SH4(3.75,0)
  rect 1.8x1.9 smd: SH2(-1.15,0) SH3(1.15,0)
  silkscreen extent -4.03,-1.45 4.03,4.35, body extent -4.4,-4.12 4.4,1.51, height 1.39
"CAP 0805_2012" [mm] "Chip Capacitor, 2-Leads, Body 2.00x1.20mm, IPC Medium Density"
  rect 1.3x1.4 smd: 1(-0.8,0) 2(0.8,0)
  silkscreen extent -1.7,-0.9 1.7,0.9, body extent -1,-0.64 1,0.64, height 1.26
"CAP 1206_3216 - 0.8MM" [mm] "Chip Capacitor, 2-Leads, Body 3.25x1.60mm, IPC Medium Density"
  rect 1.3x1.8 smd: 1(-1.45,0) 2(1.45,0)
  silkscreen extent -2.37,-1.13 2.38,1.13, body extent -1.6,-0.8 1.6,0.8, height 0.8
"CAP ALSMD 8.3MM H10.5MM" [mm] "Aluminum Electrolytic Capacitor, Body 8.30x8.30x10.50mm, IPC Low Density"
  rect 4.55x2.3 smd: 1(-3.8,0) 2(3.8,0)
  silkscreen extent -4.15,-4.15 4.15,4.15, body extent -4.95,-4.15 4.95,4.15, height 10.5
"CAP ALSMD ELEC 8.3MM H11MM" [mm] "Aluminum SMD Electrolytic Capacitor, 8.30mm Land Size, 8.00mm Diameter, 11.00mm Height, 10.00mm Maximum Leads Span"
  rect 4.3x1.8 smd: 1(-3.9,0) 2(3.9,0)
  silkscreen extent -4.15,-4.15 4.15,4.15, body extent -5,-4.15 5,4.15, height 11
CAPC3216X160N [mm]
  rect 1.24x1.82 smd: 1(-1.485,0) 2(1.485,0)
  silkscreen extent -0.54,-0.9 0.54,0.9, body extent -1.6,-0.8 1.6,0.8, height 1.6
CAPRR1500W80L1750T700H1250 [mm]
  round 1.4 hole 1.05: 1(-7.5,0) 2(7.5,0)
  silkscreen extent -8.75,-3.5 8.75,3.5
CFS20632768EZBB [mm]
  round 1.035 hole 0.46: 1(0,0) 2(1.25,0)
  silkscreen extent 0.53,-1 0.72,1, body extent -0.95,-0.95 0.95,0.95, height 12.5
CONV_RK-0505S/H [mm]
  rect 1.328x1.328 / inner round 1.328 / far side rect 1.328x1.328 hole 0.82: 1(-7.825,2.255)
  round 1.328 hole 0.82: 2(-5.285,2.255) 5(2.335,2.255) 7(7.415,2.255)
  silkscreen extent -11.02,-3.53 9.82,3.53
DIO_SZMMSZ5227BT1G [mm]
  rect 0.91x1.22 smd paste+0 mask+0.102: 1(-1.635,0) 2(1.635,0)
  silkscreen extent -2.7,-0.8 0.86,0.8, body extent -1.84,-0.8 1.84,0.8, height 1.35
DIOM4325X250N [mm]
  rect 2.12x1.5 smd: A(2.115,0) C(-2.115,0)
  silkscreen extent -4,-1.28 2.16,1.28, body extent -2.57,-1.28 2.57,1.28, height 2.5
DIOM5226X220N [mm]
  rect 2.32x1.55 smd: A(2.14,0) C(-2.14,0)
  silkscreen extent -4.05,-1.3 2.16,1.3, body extent -2.6,-1.31 2.6,1.31, height 2.21
"DO214AC SMA" [mm] "Molded Diode, 2-Leads, Body 4.30x2.60mm, IPC Medium Density"
  rect 2.5x1.7 smd: 1(-2,0) 2(2,0)
  silkscreen extent -3.68,-1.65 3.75,1.65, body extent -2.6,-1.37 2.6,1.37, height 2.4
"FCI 06-381-3PIN" [mm] "FCI Pluggable Terminal Block"
  round 2.25 hole 1.4: 1(-3.81,-3.302) 2(0,-3.302) 3(3.81,-3.302)
  silkscreen extent -6.22,-4.7 6.22,4.57, body extent -6.31,-4.7 6.31,4.5, height 7.6
"FCI 06-381-6PIN" [mm] "FCI Pluggable Terminal Block"
  round 2.25 hole 1.4: 1(-9.525,-3.302) 2(-5.715,-3.302) 3(-1.905,-3.302) 4(1.905,-3.302) 5(5.715,-3.302) 6(9.525,-3.302)
  silkscreen extent -11.94,-4.7 11.94,4.57, body extent -12.02,-4.7 12.02,4.5, height 7.6
"FER 0805_2012" [mm] "Chip Ferrite, 2-Leads, Body 2.00x1.20mm, IPC Medium Density"
  rect 1.3x1.4 smd: 1(-0.8,0) 2(0.8,0)
  silkscreen extent -1.7,-0.9 1.7,0.9, body extent -1,-0.64 1,0.64, height 1.26
"FUSE 1206_3216 0.6MM" [mm] "Chip Fuse 1.5A AC 63V DC, 2-Leads, Body 3.10x1.55mm, IPC Medium Densitym"
  rect 1.25x1.65 smd: 1(-1.725,0) 2(1.725,0)
  silkscreen extent -0.8,-0.73 0.8,0.73, body extent -1.55,-0.77 1.55,0.78, height 0.76
HANRUN_HR911105A [mm]
  rect 1.398x1.398 / inner round 1.398 / far side rect 1.398x1.398 hole 0.89: 1(4.45,-6.35)
  round 1.398 hole 0.89: 2(3.18,-8.89) 3(1.91,-6.35) 4(0.64,-8.89) 5(-0.63,-6.35) 6(-1.9,-8.89) 7(-3.17,-6.35) 8(-4.44,-8.89)
  round 1.53 hole 1.02: 9(6.625,4.9) 10(4.085,4.9) 11(-4.085,4.9) 12(-6.625,4.9)
  round 2.445 hole 1.63: 15(7.745,-3.05) 16(-7.745,-3.05)
  round 3.25 hole 3.25 unplated: ""(-5.715,0) ""(5.715,0)
  silkscreen extent -8,-10.48 9.15,10.92, body extent -8.02,-7.35 8.02,13.95, height 13.5
HARWIN_S8421-45R [mm]
  rect 2.6x3 smd: N(0,8.5)
  rect 3.6x3 smd: P(0,-12.9)
  silkscreen extent -7.88,-15.4 7.88,11.15
HOUSTON_LOGO [mm]
  silkscreen extent -3.35,2.52 7.49,4.87
IND_ASPI-0630LR-220M-T15 [mm]
  rect 2.35x3.5 smd: 1(-3.025,0) 2(3.025,0)
  silkscreen extent -3.55,-3.3 3.55,3.3
LEDC2012X70N [mm]
  rect 1.1x1.45 smd: A(0.9,0) C(-0.9,0)
  silkscreen extent -2.1,-0.6 0.2,0.6, body extent -1,-0.63 1,0.63, height 0.7
"LITEON LTV-817" [mm] "SOP, 4-Leads, Body 4.60x6.50mm, Pitch 2.54mm, IPC Medium Density"
  oval 2.1x1.4 smd: 1(-4.55,1.27) 2(-4.55,-1.27) 3(4.55,-1.27) 4(4.55,1.27)
  silkscreen extent -5.59,-2.41 3.1,2.66, body extent -5.1,-2.3 5.1,2.3, height 3.85
LQFP100-14X14MM [mil]
  rect 47x12 smd: 1(-305.12,236.22) 2(-305.12,216.53) 3(-305.12,196.85) 4(-305.12,177.17) 5(-305.12,157.48) 6(-305.12,137.8) 7(-305.12,118.11) 8(-305.12,98.43) 9(-305.12,78.74) 10(-305.12,59.06) 11(-305.12,39.37) 12(-305.12,19.68) 13(-305.12,0) 14(-305.12,-19.68) 15(-305.12,-39.37) 16(-305.12,-59.06) 17(-305.12,-78.74) 18(-305.12,-98.43) 19(-305.12,-118.11) 20(-305.12,-137.8) 21(-305.12,-157.48) 22(-305.12,-177.17) 23(-305.12,-196.85) 24(-305.12,-216.53) 25(-305.12,-236.22) 51(305.12,-236.22) 52(305.12,-216.53) 53(305.12,-196.85) 54(305.12,-177.17) 55(305.12,-157.48) 56(305.12,-137.8) 57(305.12,-118.11) 58(305.12,-98.43) 59(305.12,-78.74) 60(305.12,-59.06) 61(305.12,-39.37) 62(305.12,-19.68) 63(305.12,0) 64(305.12,19.68) 65(305.12,39.37) 66(305.12,59.06) 67(305.12,78.74) 68(305.12,98.43) 69(305.12,118.11) 70(305.12,137.8) 71(305.12,157.48) 72(305.12,177.17) 73(305.12,196.85) 74(305.12,216.53) 75(305.12,236.22)
  rect 12x47 smd: 26(-236.22,-305.12) 27(-216.53,-305.12) 28(-196.85,-305.12) 29(-177.17,-305.12) 30(-157.48,-305.12) 31(-137.8,-305.12) 32(-118.11,-305.12) 33(-98.43,-305.12) 34(-78.74,-305.12) 35(-59.06,-305.12) 36(-39.37,-305.12) 37(-19.68,-305.12) 38(0,-305.12) 39(19.68,-305.12) 40(39.37,-305.12) 41(59.06,-305.12) 42(78.74,-305.12) 43(98.43,-305.12) 44(118.11,-305.12) 45(137.8,-305.12) 46(157.48,-305.12) 47(177.17,-305.12) 48(196.85,-305.12) 49(216.53,-305.12) 50(236.22,-305.12) 76(236.22,305.12) 77(216.53,305.12) 78(196.85,305.12) 79(177.17,305.12) 80(157.48,305.12) 81(137.8,305.12) 82(118.11,305.12) 83(98.43,305.12) 84(78.74,305.12) 85(59.06,305.12) 86(39.37,305.12) 87(19.68,305.12) 88(0,305.12) 89(-19.68,305.12) 90(-39.37,305.12) 91(-59.06,305.12) 92(-78.74,305.12) 93(-98.43,305.12) 94(-118.11,305.12) 95(-137.8,305.12) 96(-157.48,305.12) 97(-177.17,305.12) 98(-196.85,305.12) 99(-216.53,305.12) 100(-236.22,305.12)
  silkscreen extent -351,-349 349,349, body extent -315,-315 315,315, height 63
MELF_SOD-80 [mil]
  rect 39x67 smd: 1(-69.5,0) 2(69.5,0)
  Keep-Out Layer region: 48,-31.5 -48,-31.5 -48,31.5 48,31.5
  silkscreen extent -37,-36 37,36, body extent -69,-31 69,31, height 63
MODULE_DM-OLED096-636 [mm]
  rect 1.508x1.508 / inner round 1.508 / far side rect 1.508x1.508 hole 1: 1(-3.81,11.5)
  round 1.508 hole 1: 2(-1.27,11.5) 3(1.27,11.5) 4(3.81,11.5)
  round 3 hole 2: S1(-11,11) S2(11,11) S3(11,-11) S4(-11,-11)
  silkscreen extent -13,-13 13,13.6, body extent -13,-13 13,13, height 5.66
MOV14D471K [mm]
  oval 3.3x1.65 hole 1.1: 1(-3.75,0) 2(3.75,0)
  silkscreen extent -8.25,-2.7 8.25,2.7, body extent -8.25,-2.2 8.25,2.2, height 20
"MURATA CAP GRM31C 1206_3216" [mm] "Chip Capacitor, 2-Leads, Body 3.25x1.60mm"
  rect 1.05x1.6 smd: 1(-1.475,0) 2(1.475,0)
  silkscreen extent -2.3,-1.1 2.3,1.1, body extent -1.6,-0.8 1.6,0.8, height 1.6
"OMRON G6DN" [mm] "1 Form A 5 A, Slim power relay"
  round 1.7 hole 1.1: 1(-9.109,1.31) 2(-6.569,1.31) 5(1.051,1.31) 8(8.671,1.31)
  silkscreen extent -10,-2.5 10,2.5, body extent -10,-2.54 10,2.54, height 12.5
"ON SEMI SOT-23-3" [mm] "SOT23, 3-Leads, Body 2.90x2.40mm, Pitch 0.95mm, IPC Medium Density"
  rect 0.9x0.8 smd: 1(-1,0.95) 2(-1,-0.95) 3(1,0)
  silkscreen extent -0.7,-1.45 0.7,1.45, body extent -1.16,-1.45 1.16,1.45, height 1
PJS008-2003-0 [mm]
  rect 0.8x1.6 smd: 1(-2.675,0.124) 2(-1.575,0.124) 3(-0.475,0.124) 4(0.625,0.124) 5(1.725,0.124) 6(2.825,0.124) 7(3.925,0.124) 8(5.025,0.124) 9(6.125,0.124)
  rect 1.4x3.1 smd: 10(7.55,-1.526)
  rect 1.95x1.4 smd: 11(7.075,-10.076)
  rect 1.5x3.5 smd: 12(7.3,-13.026) 13(-7.65,-13.026)
  rect 1.6x3.5 smd: 14(-7.55,-2.026)
  silkscreen extent -7.25,-15 7.25,0
QFP50P900X900X160-48N [mm]
  rect 1.56x0.28 smd: 1(-4.18,2.75) 2(-4.18,2.25) 3(-4.18,1.75) 4(-4.18,1.25) 5(-4.18,0.75) 6(-4.18,0.25) 7(-4.18,-0.25) 8(-4.18,-0.75) 9(-4.18,-1.25) 10(-4.18,-1.75) 11(-4.18,-2.25) 12(-4.18,-2.75) 25(4.18,-2.75) 26(4.18,-2.25) 27(4.18,-1.75) 28(4.18,-1.25) 29(4.18,-0.75) 30(4.18,-0.25) 31(4.18,0.25) 32(4.18,0.75) 33(4.18,1.25) 34(4.18,1.75) 35(4.18,2.25) 36(4.18,2.75)
  rect 0.28x1.56 smd: 13(-2.75,-4.18) 14(-2.25,-4.18) 15(-1.75,-4.18) 16(-1.25,-4.18) 17(-0.75,-4.18) 18(-0.25,-4.18) 19(0.25,-4.18) 20(0.75,-4.18) 21(1.25,-4.18) 22(1.75,-4.18) 23(2.25,-4.18) 24(2.75,-4.18) 37(2.75,4.18) 38(2.25,4.18) 39(1.75,4.18) 40(1.25,4.18) 41(0.75,4.18) 42(0.25,4.18) 43(-0.25,4.18) 44(-0.75,4.18) 45(-1.25,4.18) 46(-1.75,4.18) 47(-2.25,4.18) 48(-2.75,4.18)
  silkscreen extent -5.55,-3.55 3.55,3.55
RELAY_SRD-12VDC-SL-C [mm]
  round 1.308 hole 0.8: COIL1(-6.1,6) COIL2(-6.1,-6)
  round 1.95 hole 1.3: COM(-8.1,-0.12)
  round 1.8 hole 1.2: NC(6.1,6) NO(6.1,-6)
  silkscreen extent -10.7,-7.8 9.5,7.8, body extent -9.6,-7.8 9.6,7.8, height 15.8
"RES 0805_2012" [mm] "Chip Resistor, 2-Leads, Body 2.00x1.25mm, IPC Medium Density"
  rect 1.15x1.35 smd: 1(-0.875,0) 2(0.875,0)
  silkscreen extent -1.7,-0.9 1.7,0.9, body extent -1,-0.62 1,0.63, height 0.6
"ScrewHole_3.75mmD - duplicate" [mm] "SCREW HEAD DIA 4.5MM, SREW LEG DIA 3 MM"
  round 3.75 hole 3.75 unplated: 1(0,0)
  silkscreen extent -2.3,-2.3 2.3,2.3
SM712.TCT [mm]
  rect 1.4x1 smd paste-2: 1(-1.1,0.95) 2(-1.1,-0.95) 3(1.1,0)
  silkscreen extent -1.3,-1.45 0.65,2.05, body extent -1.18,-1.45 1.18,1.45, height 1.2
SOD-523_DIOTEC-SEMICONDUCTOR [mm]
  rect 0.54x0.49 smd paste-1 mask+0: 1(-0.8,0) 2(0.8,0)
  Keep-Out Layer circle w0: c0,0.3 r0.15
  Keep-Out Layer circle w0: c0,-0.3 r0.15
  silkscreen extent -0.2,-0.25 0.2,0.25, body extent -0.23,-0.7 1.48,0, height 0.85
SODFL4725X110N [mm]
  rect 1.17x1.92 smd paste+0 mask+0.102: A(2.125,0) C(-2.125,0)
  silkscreen extent -3.5,-1.25 1.22,1.25
SOIC127P600X175-8N#1 [mm]
  rrect25% 1.97x0.59 smd paste+0 mask+0.102: 1(-2.475,1.905) 2(-2.475,0.635) 3(-2.475,-0.635) 4(-2.475,-1.905) 5(2.475,-1.905) 6(2.475,-0.635) 7(2.475,0.635) 8(2.475,1.905)
  silkscreen extent -4.54,-2.52 2,2.59, body extent -3,-2.49 3,2.49, height 1.68
SOIC127P600X175-8N#2 [mm]
  rect 1.981x0.559 smd: 1(-2.464,1.905) 2(-2.464,0.635) 3(-2.464,-0.635) 4(-2.464,-1.905) 5(2.464,-1.905) 6(2.464,-0.635) 7(2.464,0.635) 8(2.464,1.905)
  silkscreen extent -1.37,-2.49 1.37,2.49, body extent -3,-2.45 3,2.45, height 1.75
SOIC127P600X175-8N#3 [mm]
  rect 1.651x0.559 smd: 1(-2.642,1.905) 2(-2.642,0.635) 3(-2.642,-0.635) 4(-2.642,-1.905) 5(2.642,-1.905) 6(2.642,-0.635) 7(2.642,0.635) 8(2.642,1.905)
  silkscreen extent -1.7,-2.49 1.7,2.49, body extent -3,-2.45 3,2.45, height 1.75
SOIC127P600X175-14N [mil]
  rect 67x21 smd: 1(-102,150) 2(-102,100) 3(-102,50) 4(-102,0) 5(-102,-50) 6(-102,-100) 7(-102,-150) 8(102,-150) 9(102,-100) 10(102,-50) 11(102,0) 12(102,50) 13(102,100) 14(102,150)
  silkscreen extent -63,-172 63,172, body extent -118,-170 118,170, height 69
SOIC127P600X175-16N#1 [mm]
  rrect25% 1.97x0.59 smd: 1(-2.475,4.445) 2(-2.475,3.175) 3(-2.475,1.905) 4(-2.475,0.635) 5(-2.475,-0.635) 6(-2.475,-1.905) 7(-2.475,-3.175) 8(-2.475,-4.445) 9(2.475,-4.445) 10(2.475,-3.175) 11(2.475,-1.905) 12(2.475,-0.635) 13(2.475,0.635) 14(2.475,1.905) 15(2.475,3.175) 16(2.475,4.445)
  silkscreen extent -4.54,-5.06 2,5.13, body extent -3,-5 3,5, height 1.75
SOIC127P600X175-16N#2 [mm]
  rrect25% 1.97x0.6 smd paste+0 mask+0.102: 1(-2.475,4.445) 2(-2.475,3.175) 3(-2.475,1.905) 4(-2.475,0.635) 5(-2.475,-0.635) 6(-2.475,-1.905) 7(-2.475,-3.175) 8(-2.475,-4.445) 9(2.475,-4.445) 10(2.475,-3.175) 11(2.475,-1.905) 12(2.475,-0.635) 13(2.475,0.635) 14(2.475,1.905) 15(2.475,3.175) 16(2.475,4.445)
  silkscreen extent -4.25,-5.07 1.95,5.06, body extent -3,-4.95 3,4.95, height 1.75
SOIC127P790X216-8N [mm]
  rrect25% 1.61x0.58 smd: 1(-3.605,1.905) 2(-3.605,0.635) 3(-3.605,-0.635) 4(-3.605,-1.905) 5(3.605,-1.905) 6(3.605,-0.635) 7(3.605,0.635) 8(3.605,1.905)
  silkscreen extent -5.31,-2.64 2.64,2.64, body extent -3.95,-2.64 3.95,2.64, height 2.16
SOT95P280X145-5N [mm]
  rrect50% 1.1x0.6 smd: 1(-1.3,0.95) 2(-1.3,0) 3(-1.3,-0.95) 4(1.3,-0.95) 5(1.3,0.95)
  silkscreen extent -2.52,0.78 -2.08,1.22, body extent -1.4,-1.45 1.4,1.45, height 1.45
SOT95P280X145-6N [mm]
  rect 1.2x0.6 smd: 1(-1.25,0.95) 2(-1.25,0) 3(-1.25,-0.95) 4(1.25,-0.95) 5(1.25,0) 6(1.25,0.95)
  silkscreen extent -1.85,-1.46 0.3,1.6, body extent -1.4,-1.46 1.4,1.46, height 0.4
"SULLINS NPPN051BFCN" [mm]
  oval 1.5x2 hole 0.8: 1(-4,0) 2(-2,0) 3(0,0) 4(2,0) 5(4,0)
  silkscreen extent -5.2,-1.2 5.2,1.2, body extent -5.25,-1.2 5.25,1.2, height 4.41
"SULLINS NPPN061BFCN" [mm]
  oval 1.5x2 hole 0.8: 1(-5,0) 2(-3,0) 3(-1,0) 4(1,0) 5(3,0) 6(5,0)
  silkscreen extent -6.2,-1.2 6.2,1.2, body extent -6.25,-1.2 6.25,1.2, height 4.41
SW_MSK12C02 [mm]
  rect 0.9x1.25 smd paste+0 mask+0.102: 1(-2.25,2.075) 2(0.75,2.075) 3(2.25,2.075)
  rect 0.8x0.9 smd paste+0 mask+0.102: 4_1(-3.8,1.1) 4_2(-3.8,-1.1) 4_3(3.8,-1.1) 4_4(3.8,1.1)
  round 0.9 hole 0.9 unplated mask+0: ""(-1.5,0) ""(1.5,0)
  silkscreen extent -3.5,-1.4 3.5,3.35, body extent -4,-2.75 4,2.4, height 1.5
"TE 282837-2" [mm] "Wire to Board Terminal Block Horizontal with Board, 2 Postions, Body 10.76x8.2 mm, Pitch 5.08mm"
  round 2.2 hole 1.1: 1(-2.54,0) 2(2.54,0)
  silkscreen extent -5.08,-4.1 5.68,4.1, body extent -5.08,-4.1 5.68,4.1, height 10.3
TENSILITY_54-00013 [mm]
  oval 0.9x1.8 hole 0.5 square: 1(0,0.55) 2(0,2.55) 3(0,4.55) 4(0,6.55)
  round 2.7 hole 1.8: SH1(-2.7,0) SH2(2.7,0) SH3(-2.7,7.1) SH4(2.7,7.1)
  silkscreen extent -3.8,-11.6 4.85,7.9, body extent -3.8,-11.8 3.8,7.7, height 14.7
VREG_LM1117IMP-3.3/NOPB [mm]
  rect 2.15x0.95 smd: 1(-2.9,2.3) 2(-2.9,0) 3(-2.9,-2.3)
  rect 2.15x3.25 smd: 4(2.9,0)
  silkscreen extent -4.7,-3.25 1.75,3.25, body extent -3.5,-3.25 3.5,3.25, height 1.8
VREG_TPS79625KTTR [mm]
  rect 3.4x1 smd paste-0.05 mask+0.07: 1(-10.6,3.4) 2(-10.6,1.7) 3(-10.6,0) 4(-10.6,-1.7) 5(-10.6,-3.4)
  rect 8.6x10.7 smd paste-0.05 mask+0.07: 6(0,0)
  silkscreen extent -13.3,-5.08 -4.62,5.08, body extent -7.18,-5.08 7.18,5.08, height 4.65
XTAL_ECS-160-20-4X [mm]
  round 1.03 hole 0.63: 1(-2.44,0) 2(2.44,0)
  silkscreen extent -5.68,-2.33 5.68,2.33, body extent -5.68,-2.32 5.68,2.32, height 3.5
"YAGEO RES 0805_2012" [mm] "Chip Resistor, 2-Leads, Body 2.00x1.25mm"
  rect 0.9x1.2 smd: 1(-1.05,0) 2(1.05,0)
  silkscreen extent -1.7,-0.8 1.7,0.8, body extent -1,-0.62 1,0.63, height 0.6

## Part data
C1 C2 C3 C4 C48 C49: library part 08055A150JAT2A, "CAP CER 15PF 50V C0G/NP0 0805", Device Package="0805 (2012 Metric)", manufacturer="AVX Corporation", Operating Temperature="-55°C ~ 125°C", Supplier Part Number 1=478-1306-1-ND, Temperature Coefficient="C0G, NP0", Tolerance=±5%, Voltage - Rated=50V, Applications="General Purpose", Capacitance=15pF, componentlink1description=Datasheet, componentlink1url=http://datasheets.avx.com/C0GNP0-Dielectric.pdf, componentlink2description="DigiKey Link", componentlink2url=http://digikey.com/product-detail/en/avx-corporation/08055A150JAT2A/478-1306-1-ND/564338, lastupdated="02-09-2020 1.04.40 AM", Lifecycle Status=Active, Minimum Order=1, Mounting Type="Surface Mount, MLCC", Package / Case="0805 (2012 Metric)", packaging=TapeAndReel, Part Number=08055A150JAT2A, Part Status=Active, partid=3213, price=0.02, series=-, Size / Dimension="0.079\" L x 0.049\" W (2.01mm x 1.25mm)", Supplier 1=DigiKey, Thickness (Max)="0.037\" (0.94mm)"
C7 C8 C9 C10 C11 C12 C16 C17 C22 C23 C25 C31 C32 C37 C38 C40 C41 C42 C43 C44 C45 C46 C57 C60 C61 C64 C66 C69 C72: library part 0805ZC105KAT4A, "CAP CER 1UF 10V X7R 0805", Capacitance=0.1µF, Device Package="0805 (2012 Metric)", manufacturer="AVX Corporation", Operating Temperature="-55°C ~ 125°C", Supplier Part Number 1=478-7604-1-ND, Temperature Coefficient=X7R, Tolerance=±10%, Voltage - Rated=10V, Applications="General Purpose", componentlink1description=Datasheet, componentlink1url=http://datasheets.avx.com/X7RDielectric.pdf, componentlink2description="DigiKey Link", componentlink2url=http://digikey.com/product-detail/en/avx-corporation/0805ZC105KAT4A/478-7604-1-ND/7536237, lastupdated="02-09-2020 1.04.40 AM", Lifecycle Status=Active, Minimum Order=1, Mounting Type="Surface Mount, MLCC", Package / Case="0805 (2012 Metric)", packaging=TapeAndReel, Part Number=0805ZC105KAT4A, Part Status=Active, partid=3500, price=0.17, series=-, Size / Dimension="0.079\" L x 0.049\" W (2.00mm x 1.25mm)", Supplier 1=DigiKey, Thickness (Max)="0.037\" (0.94mm)"
C13 C14 C54 C73: library part C0805X475M3RAC7800, "4.70UF 25.0V", Device Package="0805 (2012 Metric)", manufacturer=KEMET, Operating Temperature="-55°C ~ 125°C", Supplier Part Number 1=399-C0805X475M3RAC7800CT-ND, Temperature Coefficient=X7R, Tolerance=±20%, Voltage - Rated=25V, Applications="Boardflex Sensitive", Capacitance="4.7 µF", componentlink1description=Datasheet, componentlink1url=https://connect.kemet.com:7667/gateway/IntelliData-ComponentDocumentation/1.0/download/datasheet/C0805X475M3RAC7800, componentlink2description="DigiKey Link", componentlink2url=https://www.digikey.com/en/products/detail/kemet/C0805X475M3RAC7800/12082671, Features="Soft Termination", Lifecycle Status=Active, Minimum Order=1, Mounting Type="Surface Mount, MLCC", Package / Case="0805 (2012 Metric)", packaging=TapeAndReel, Part Number=C0805X475M3RAC7800, Part Status=Active, partid=46494, series="SMD Comm X7R Flex", Size / Dimension="0.079\" L x 0.049\" W (2.00mm x 1.25mm)", Supplier 1=DigiKey, Thickness (Max)="0.057\" (1.45mm)"
  C13 C14 C73: lastupdated="29-03-2026 7.18.51 PM", price=0.15
  C54: lastupdated="09-02-2024 8.14.56 PM", price=0.14
C15 C39 C47 C58 C59: library part EMK316BJ106MD-T, "CAP CER 10UF 16V X5R 1206", Device Package="1206 (3216 Metric)", manufacturer="Taiyo Yuden", Operating Temperature="-55°C ~ 85°C", Supplier Part Number 1=587-4881-1-ND, Temperature Coefficient=X5R, Tolerance=±20%, Voltage - Rated=16V, Applications="SMPS Filtering", Capacitance="10 µF", componentlink1description=Datasheet, componentlink1url=http://www.yuden.co.jp/productdata/catalog/mlcc06_e.pdf, componentlink2description="DigiKey Link", componentlink2url=https://www.digikey.com/en/products/detail/taiyo-yuden/EMK316BJ106MD-T/6563474, lastupdated="04-06-2024 7.10.41 PM", Lifecycle Status=Active, Minimum Order=1, Mounting Type="Surface Mount, MLCC", Package / Case="1206 (3216 Metric)", packaging=TapeAndReel, Part Number=EMK316BJ106MD-T, Part Status=Active, partid=18996, price=0.04, series=M, Size / Dimension="0.126\" L x 0.063\" W (3.20mm x 1.60mm)", Supplier 1=DigiKey, Thickness (Max)="0.037\" (0.95mm)"
C18 C19 C20 C21 C27 C28 C29 C30 C33 C34 C35 C36: library part 0805ZC105KAT4A, "CAP CER 1UF 10V X7R 0805", Device Package="0805 (2012 Metric)", manufacturer="AVX Corporation", Operating Temperature="-55°C ~ 125°C", Supplier Part Number 1=478-7604-1-ND, Temperature Coefficient=X7R, Tolerance=±10%, Voltage - Rated=10V, Applications="General Purpose", Capacitance=1µF, componentlink1description=Datasheet, componentlink1url=http://datasheets.avx.com/X7RDielectric.pdf, componentlink2description="DigiKey Link", componentlink2url=http://digikey.com/product-detail/en/avx-corporation/0805ZC105KAT4A/478-7604-1-ND/7536237, lastupdated="02-09-2020 1.04.40 AM", Lifecycle Status=Active, Minimum Order=1, Mounting Type="Surface Mount, MLCC", Package / Case="0805 (2012 Metric)", packaging=TapeAndReel, Part Number=0805ZC105KAT4A, Part Status=Active, partid=3500, price=0.17, series=-, Size / Dimension="0.079\" L x 0.049\" W (2.00mm x 1.25mm)", Supplier 1=DigiKey, Thickness (Max)="0.037\" (0.94mm)"
C24 C26: library part C0805C102F3HACAUTO, "CAP CER 0805 1NF 25V ULTRA STABL", Device Package="0805 (2012 Metric)", manufacturer=KEMET, Operating Temperature="-55°C ~ 150°C", Ratings=AEC-Q200, Supplier Part Number 1=399-C0805C102F3HACAUTOCT-ND, Temperature Coefficient=X8R, Tolerance=±1%, Voltage - Rated=25V, Applications=Automotive, Capacitance="1000 pF", componentlink1description=Datasheet, componentlink1url=https://api.kemet.com/component-edge/download/datasheet/C0805C102F3HACAUTO.pdf, componentlink2description="DigiKey Link", componentlink2url=https://www.digikey.com/en/products/detail/kemet/C0805C102F3HACAUTO/7958218, Features="Low ESL, High Temperature", lastupdated="09-02-2024 8.15.10 PM", Lifecycle Status=Active, Minimum Order=1, Mounting Type="Surface Mount, MLCC", Package / Case="0805 (2012 Metric)", packaging=TapeAndReel, Part Number=C0805C102F3HACAUTO, Part Status=Active, partid=32894, price=0.04, series="SMD Auto X8R HT150C", Size / Dimension="0.079\" L x 0.049\" W (2.00mm x 1.25mm)", Supplier 1=DigiKey, Thickness (Max)="0.035\" (0.88mm)"
C50: library part C0805C223K5RECAUTO, "CAP CER 0805 22NF 50V X7R 10%", Device Package="0805 (2012 Metric)", manufacturer=KEMET, Operating Temperature="-55°C ~ 125°C", Ratings=AEC-Q200, Supplier Part Number 1=399-17886-1-ND, Temperature Coefficient=X7R, Tolerance=±10%, Voltage - Rated=50V, Applications="Automotive, ESD Protection", Capacitance="0.022 µF", componentlink1description=Datasheet, componentlink1url=https://api.kemet.com/component-edge/download/datasheet/C0805C223K5RECAUTO.pdf, componentlink2description="DigiKey Link", componentlink2url=https://www.digikey.com/en/products/detail/kemet/C0805C223K5RECAUTO/8640480, lastupdated="09-02-2024 8.15.30 PM", Lifecycle Status=Active, Minimum Order=1, Mounting Type="Surface Mount, MLCC", Package / Case="0805 (2012 Metric)", packaging=TapeAndReel, Part Number=C0805C223K5RECAUTO, Part Status=Active, partid=15719, price=0.04, series="ESD SMD Auto X7R", Size / Dimension="0.079\" L x 0.049\" W (2.00mm x 1.25mm)", Supplier 1=DigiKey, Thickness (Max)="0.035\" (0.88mm)"
C51 C52: library part C0805C682M3GEC7800, "CAP CER 0805 6.8NF 25V C0G 20%", Device Package="0805 (2012 Metric)", manufacturer=KEMET, Operating Temperature="-55°C ~ 125°C", Supplier Part Number 1=399-C0805C682M3GEC7800CT-ND, Temperature Coefficient="C0G, NP0", Tolerance=±20%, Voltage - Rated=25V, Applications="ESD Protection", Capacitance="6800 pF", componentlink1description=Datasheet, componentlink1url=https://connect.kemet.com:7667/gateway/IntelliData-ComponentDocumentation/1.0/download/datasheet/C0805C682M3GEC7800, componentlink2description="DigiKey Link", componentlink2url=https://www.digikey.com/en/products/detail/kemet/C0805C682M3GEC7800/8644610, Features="Low ESL", lastupdated="09-02-2024 8.14.56 PM", Lifecycle Status=Active, Minimum Order=1, Mounting Type="Surface Mount, MLCC", Package / Case="0805 (2012 Metric)", packaging=TapeAndReel, Part Number=C0805C682M3GEC7800, Part Status=Active, partid=46454, price=0.06, series="ESD SMD Comm C0G", Size / Dimension="0.079\" L x 0.049\" W (2.00mm x 1.25mm)", Supplier 1=DigiKey, Thickness (Max)="0.055\" (1.40mm)"
C53 C55: library part C0805X103K1RAC3316, "CAP CER 0805 10NF 100V X7R", Device Package="0805 (2012 Metric)", manufacturer=KEMET, Operating Temperature="-55°C ~ 125°C", Ratings=AEC-Q200, Supplier Part Number 1=399-C0805X103K1RAC3316CT-ND, Temperature Coefficient=X7R, Tolerance=±10%, Voltage - Rated=100V, Applications="Automotive, Boardflex Sensitive", Capacitance="10000 pF", componentlink1description=Datasheet, componentlink1url=https://api.kemet.com/component-edge/download/datasheet/C0805X103K1RAC3316.pdf, componentlink2description="DigiKey Link", componentlink2url=https://www.digikey.com/en/products/detail/kemet/C0805X103K1RAC3316/10315780, Features="Soft Termination", lastupdated="09-02-2024 8.16.09 PM", Lifecycle Status=Active, Minimum Order=1, Mounting Type="Surface Mount, MLCC", Package / Case="0805 (2012 Metric)", packaging=TapeAndReel, Part Number=C0805X103K1RAC3316, Part Status=Active, partid=2565, price=0.02, series="SMD Auto X7R VW80808", Size / Dimension="0.079\" L x 0.049\" W (2.00mm x 1.25mm)", Supplier 1=DigiKey, Thickness (Max)="0.039\" (0.98mm)"
C56: "1000 pF Â±10% 2000V (2kV) Ceramic Capacitor X7R 1206 (3216 Metric)", Package="3216 Knowles Syfer", Check_prices=https://www.snapeda.com/parts/1206Y2K00102KXT/Knowles+Syfer/view-part/?ref=eda, MF="Knowles Syfer", MP=1206Y2K00102KXT, SnapEDA_Link=https://www.snapeda.com/parts/1206Y2K00102KXT/Knowles+Syfer/view-part/?ref=snap
C62 C67: library part UCH1V221MCS1GS, "CAP ALUM 220UF 20% 35V SMD", ESR (Equivalent Series Resistance)="200mOhm @ 100kHz", Lifetime @ Temp.="2000 Hrs @ 125°C", manufacturer=Nichicon, Operating Temperature="-40°C ~ 125°C", Ratings=AEC-Q200, Ripple Current @ High Frequency="270 mA @ 100 kHz", Ripple Current @ Low Frequency="135 mA @ 120 Hz", Supplier Part Number 1=UCH1V221MCS1CT-ND, Tolerance=±20%, Voltage - Rated="35 V", Applications=Automotive, Capacitance="220 µF", componentlink1description=Datasheet, componentlink1url=https://www.nichicon.co.jp/english/series_items/catalog_pdf/e-uch.pdf, componentlink2description="DigiKey Link", componentlink2url=https://www.digikey.com/en/products/detail/nichicon/UCH1V221MCS1GS/13402772, Height - Seated (Max)="0.433\" (11.00mm)", lastupdated="03-06-2024 8.26.59 PM", Lifecycle Status=Active, Minimum Order=1, Mounting Type="Surface Mount", packaging=TapeAndReel, Part Number=UCH1V221MCS1GS, partid=28619, Polarization=Polar, price=0.47, series=UCH, Size / Dimension="0.315\" Dia (8.00mm)", Supplier 1=DigiKey, Surface Mount Land Size="0.327\" L x 0.327\" W (8.30mm x 8.30mm)"
C63 C68: library part EMZL100ARA471MHA0G, "CAP ALUM 470UF 20% 10V SMD", ESR (Equivalent Series Resistance)="160mOhm @ 100kHz", Lifetime @ Temp.="5000 Hrs @ 105°C", manufacturer=Chemi-Con, Operating Temperature="-55°C ~ 105°C", Ratings=AEC-Q200, Ripple Current @ High Frequency="600 mA @ 100 kHz", Ripple Current @ Low Frequency="300 mA @ 120 Hz", Supplier Part Number 1=565-EMZL100ARA471MHA0GCT-ND, Tolerance=±20%, Voltage - Rated="10 V", Applications=Automotive, Capacitance="470 µF", componentlink1description=Datasheet, componentlink1url=https://www.chemi-con.co.jp/products/relatedfiles/capacitor/catalog/MZLRA-e.PDF, componentlink2description="DigiKey Link", componentlink2url=https://www.digikey.com/en/products/detail/chemi-con/EMZL100ARA471MHA0G/17728433, Height - Seated (Max)="0.413\" (10.50mm)", lastupdated="03-06-2024 8.15.40 PM", Lifecycle Status=Active, Minimum Order=1, Mounting Type="Surface Mount", packaging=TapeAndReel, Part Number=EMZL100ARA471MHA0G, partid=28535, Polarization=Polar, price=0.15, series="Alchip™- MZL", Size / Dimension="0.315\" Dia (8.00mm)", Supplier 1=DigiKey, Surface Mount Land Size="0.327\" L x 0.327\" W (8.30mm x 8.30mm)"
C65 D57 D66 L1 L2 S1: Package=None, Availability=Unavailable, price=None
  C65: MP=ECWFE2W105JA
  D57: MP=SZMMSZ5227BT1G
  D66: MP=SMAJ5.0AH
  L1 L2: MF="{'manufacturer': u'Abracon LLC'}", MP=ASPI-0630LR-220M-T15
  S1: MP=MSK12C02
C70 C71: library part GRM31CR71E106KA12K, "CAP CER 10UF 25V X7R 1206", Device Package="1206 (3216 Metric)", manufacturer="Murata Electronics", Operating Temperature="-55°C ~ 125°C", Supplier Part Number 1=490-14678-1-ND, Temperature Coefficient=X7R, Tolerance=±10%, Voltage - Rated=25V, Applications="General Purpose", Capacitance="10 µF", componentlink1description=Datasheet, componentlink1url=https://search.murata.co.jp/Ceramy/image/img/A01X/G101/ENG/GRM31CR71E106KA12-01.pdf, componentlink2description="DigiKey Link", componentlink2url=https://www.digikey.com/en/products/detail/murata-electronics/GRM31CR71E106KA12K/4905618, lastupdated="29-03-2026 9.05.15 PM", Lifecycle Status=Active, Minimum Order=1, Mounting Type="Surface Mount, MLCC", Package / Case="1206 (3216 Metric)", packaging=TapeAndReel, Part Number=GRM31CR71E106KA12K, Part Status=Active, partid=19493, price=0.07, series=GRM, Size / Dimension="0.126\" L x 0.063\" W (3.20mm x 1.60mm)", Supplier 1=DigiKey, Thickness (Max)="0.071\" (1.80mm)"